# EAGLE board circuit_R1a (EAGLE 7.6.0)
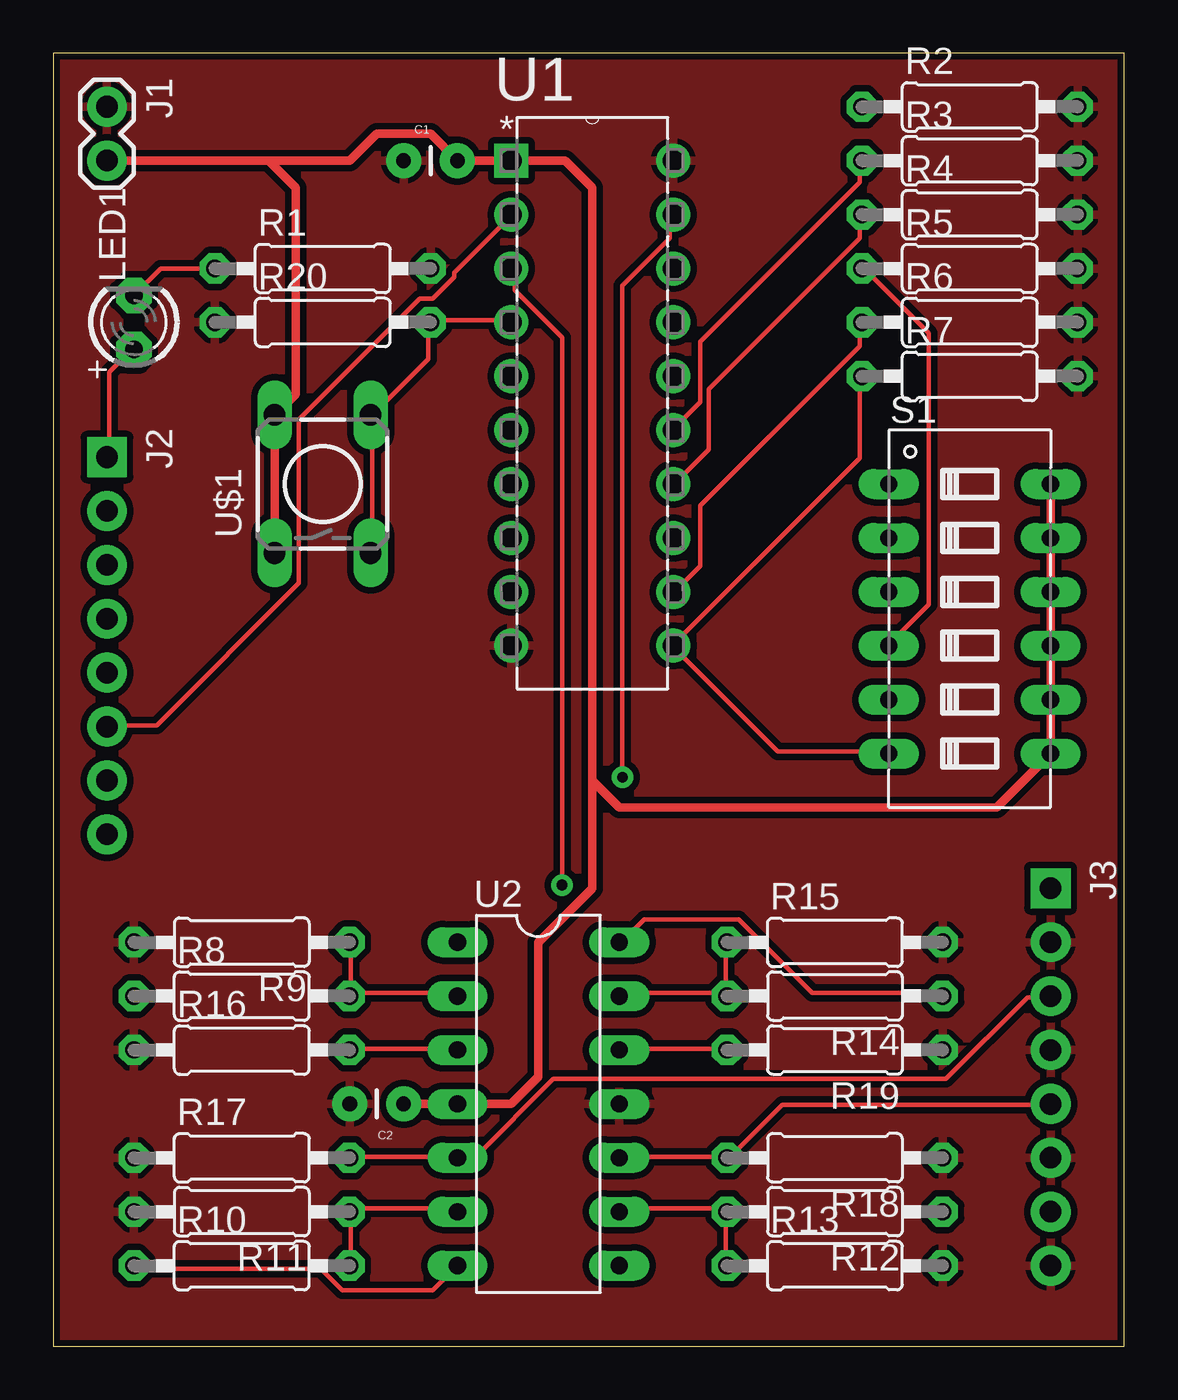
[diagram p0: board, top side]
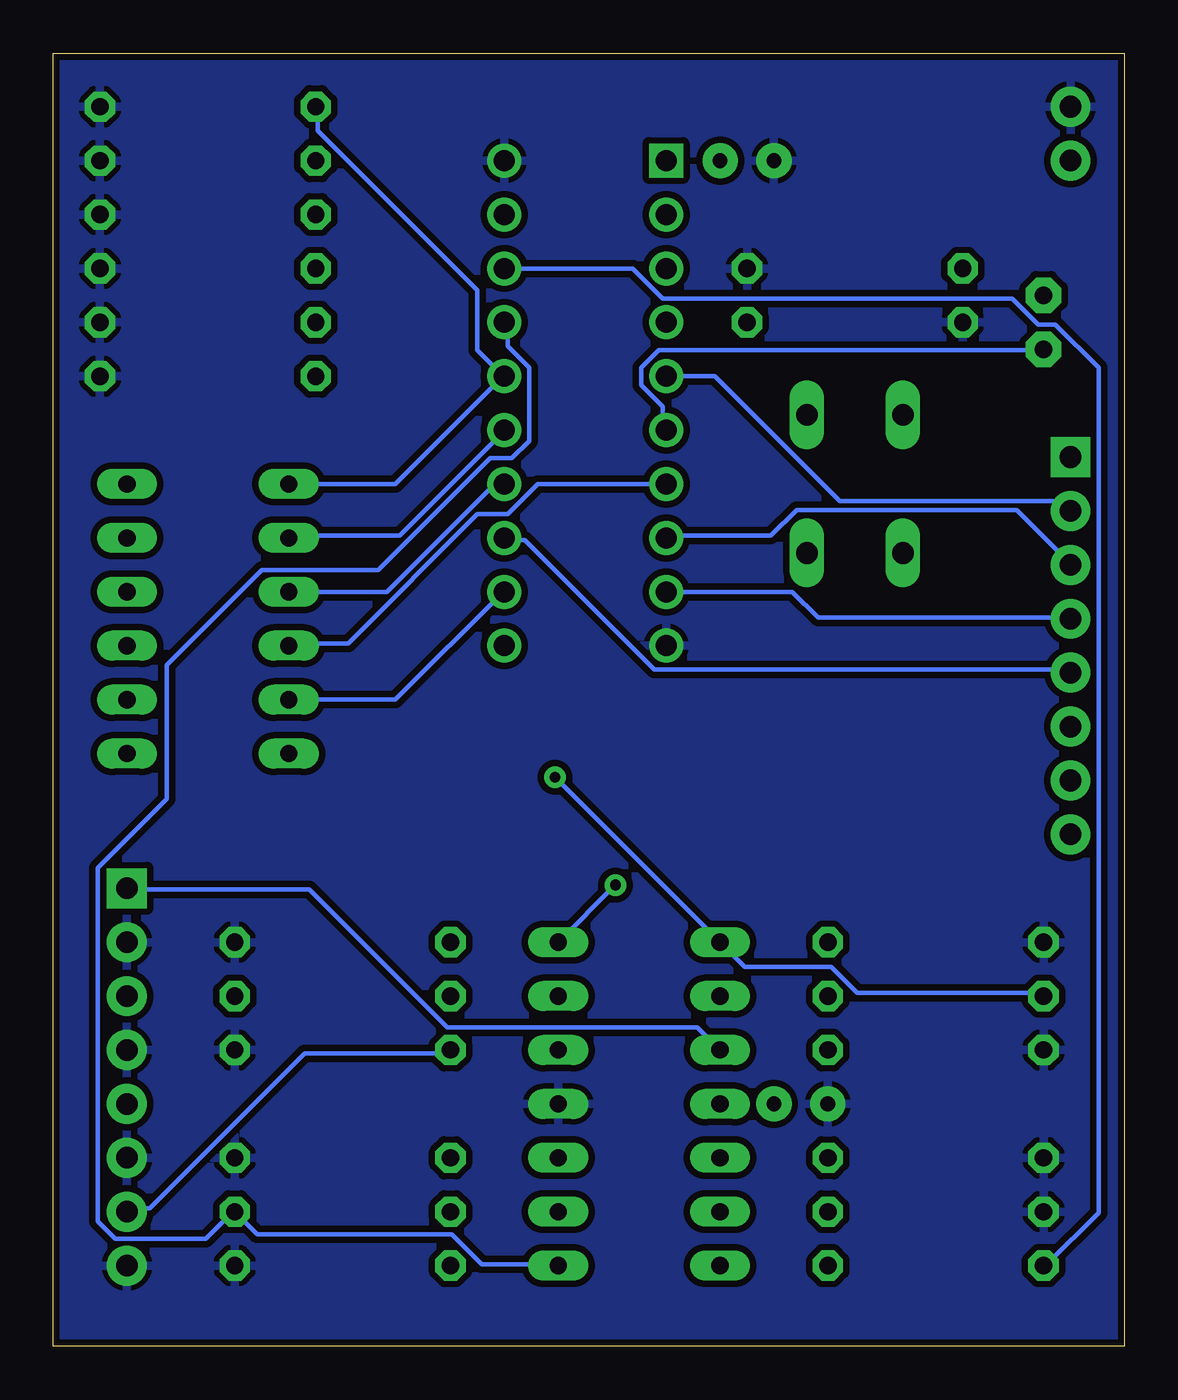
[diagram p1: board, bottom side, seen from below]

Size 50.47 x 60.95 mm. Coordinates in mm from the lower left corner, seen from the top.
Outline: 0,0 50.47,0 50.47,60.95 0,60.95 0,0
Copper layers (1*16): Top 0.035mm / dielectric 1.5mm / Bottom 0.035mm
Design rules "SparkFun": minimum track width 8mil, minimum drill 20mil, track to track 8mil, track to pad 8mil, pad to pad 8mil, via to via 8mil, smd to smd 8mil, copper to edge 8mil, drill to drill 8mil, minimum pad ring 12mil, minimum via ring 10mil, stop-mask expansion 4mil, vias tented up to drill 20mil, thermal gap 10mil

## Footprints (pad centres in the part's own frame; a part is rotated, then mirrored left to right if it is on the bottom)
CAP-PTH-SMALL = drill 0.7 pad 1.651: 1 0,0; 2 2.54,0
1X02 = drill 1.016 pad 1.88: 1 0,0; 2 2.54,0
1X08_PIN1_NO_SILK = drill 1.016 pad 1.88 square: 1 0,0 | drill 1.016 pad 1.88: 2 2.54,0; 3 5.08,0; 4 7.62,0; 5 10.16,0; 6 12.7,0; 7 15.24,0; 8 17.78,0
LED3MM = drill 0.813 pad 1.676 octagon: A -1.27,0; K 1.27,0
0207/10 = drill 0.813 octagon: 1 -5.08,0; 2 5.08,0
DIP06YL = drill 0.813 long: 1 -6.35,-3.81; 2 -3.81,-3.81; 3 -1.27,-3.81; 4 1.27,-3.81; 5 3.81,-3.81; 6 6.35,-3.81; 7 6.35,3.81; 8 3.81,3.81; 9 1.27,3.81; 10 -1.27,3.81; 11 -3.81,3.81; 12 -6.35,3.81
DIP254P762X533-20 = drill 0.991 square: 1 -7.62,22.86 | drill 0.991: 2 -7.62,20.32; 3 -7.62,17.78; 4 -7.62,15.24; 5 -7.62,12.7; 6 -7.62,10.16; 7 -7.62,7.62; 8 -7.62,5.08; 9 -7.62,2.54; 10 -7.62,0; 11 0,0; 12 0,2.54; 13 0,5.08; 14 0,7.62; 15 0,10.16; 16 0,12.7; 17 0,15.24; 18 0,17.78; 19 0,20.32; 20 0,22.86
DIL14 = drill 0.813 long: 1 -7.62,-3.81; 2 -5.08,-3.81; 3 -2.54,-3.81; 4 0,-3.81; 5 2.54,-3.81; 6 5.08,-3.81; 7 7.62,-3.81; 8 7.62,3.81; 9 5.08,3.81; 10 2.54,3.81; 11 0,3.81; 12 -2.54,3.81; 13 -5.08,3.81; 14 -7.62,3.81
TAC-SWITCH-PTH = drill 1.016 pad 1.524 long: 1 -3.251,2.261; 2 3.251,2.261; 3 -3.251,-2.261; 4 3.251,-2.261

## Placement (x,y rotation side)
C1  0.1uF  [CAP-PTH-SMALL]  16.51,55.88 0 top
C2  0.1uF  [CAP-PTH-SMALL]  16.51,11.43 180 top
J1  [1X02]  2.54,58.42 270 top
J2  [1X08_PIN1_NO_SILK]  2.54,41.91 270 top
J3  [1X08_PIN1_NO_SILK]  46.99,21.59 270 top
LED1  [LED3MM]  3.81,48.26 90 top
R1  430  [0207/10]  12.7,50.8 0 top
R2  1000  [0207/10]  43.18,58.42 0 top
R3  1000  [0207/10]  43.18,55.88 0 top
R4  1000  [0207/10]  43.18,53.34 0 top
R5  1000  [0207/10]  43.18,50.8 0 top
R6  1000  [0207/10]  43.18,48.26 0 top
R7  1000  [0207/10]  43.18,45.72 0 top
R8  1000  [0207/10]  8.89,16.51 0 top
R9  100  [0207/10]  8.89,19.05 180 top
R10  1000  [0207/10]  8.89,3.81 0 top
R11  100  [0207/10]  8.89,6.35 180 top
R12  1000  [0207/10]  36.83,6.35 180 top
R13  100  [0207/10]  36.83,3.81 0 top
R14  1000  [0207/10]  36.83,16.51 180 top
R15  100  [0207/10]  36.83,19.05 0 top
R16  1000000  [0207/10]  8.89,13.97 0 top
R17  1000000  [0207/10]  8.89,8.89 0 top
R18  1000000  [0207/10]  36.83,8.89 180 top
R19  1000000  [0207/10]  36.83,13.97 180 top
R20  1000  [0207/10]  12.7,48.26 0 top
S1  [DIP06YL]  43.18,34.29 270 top
U1  PIC16F687-I/P  [DIP254P762X533-20]  29.21,33.02 0 top
U2  LM324N  [DIL14]  22.86,11.43 270 top
U$1  TACTILE-SWITCH-PTH  [TAC-SWITCH-PTH]  12.7,40.64 90 top

## Library data of the parts
C1 C2 = SparkFun-Capacitors
J1-J3 = SparkFun-Connectors
LED1 = adafruit
R1-R20 = eagle-ltspice; SPICEMODEL: NONE; SPICEPREFIX: R
S1 = switch-dil; OC_FARNELL: unknown; OC_NEWARK: unknown
U1 = Microchip_By_element14_Batch_1; MPN: PIC16F687-I/P; OC_FARNELL: 1103401; OC_NEWARK: 56J7529; PACKAGE: DIP-20; SUPPLIER: Microchip
U2 = linear
U$1 = GeekAmmo

## Nets
BOUCLIER1: J3.1 R16.2 U2.3
BOUCLIER2: J3.3 R17.2 U2.5
BOUCLIER3: J3.5 R18.2 U2.10
BOUCLIER4: J3.7 R19.2 U2.12
GND: C1.1 C2.2 J1.1 J3.2 J3.4 J3.6 J3.8 R1.2 R2.2 R3.2 R4.2 R5.2 R6.2 R7.2 R9.2 R11.2 R13.2 R15.2 R16.1 R17.1 R18.1 R19.1 R20.1 U1.10 U1.20 U2.11
N$1: R10.2 R11.1 U2.6
N$2: LED1.K R1.1
N$3: R8.2 R9.1 U2.2
N$5: R12.2 R13.1 U2.9
N$6: R14.2 R15.1 U2.13
RA0: R8.1 U1.19 U2.1
RA1: R10.1 U1.18 U2.7
RA2: R12.1 U1.17 U2.8
RA3: R20.2 U1.4 U$1.3 U$1.4
RA4: R14.1 U1.3 U2.14
RA5: J2.6 U1.2
RB4: J2.5 U1.13
RB5: R6.1 S1.5 U1.12
RB6: R7.1 S1.6 U1.11
RC0: R2.1 S1.1 U1.16
RC1: R3.1 S1.2 U1.15
RC2: R4.1 S1.3 U1.14
RC3: R5.1 S1.4 U1.7
RC4: J2.1 LED1.A U1.6
RC5: J2.2 U1.5
RC6: J2.3 U1.8
RC7: J2.4 U1.9
VCC: C1.2 C2.1 J1.2 S1.7 S1.8 S1.9 S1.10 S1.11 S1.12 U1.1 U2.4 U$1.1 U$1.2

## Tracks (layer width: path | path; a pad name or v marks a point on that pad's centre or on a via)
BOUCLIER1
  Top 0.203: R16.2 14.02,14.02 18.9,14.02 U2.3
  Bottom 0.203: U2.3 20.12,15.04 31.9,15.04 38.41,21.54 46.94,21.54 J3.1
BOUCLIER2
  Top 0.203: R17.2 14.02,8.94 18.9,8.94 U2.5 19.1,8.94 19.91,8.94 23.57,12.6 42.06,12.6 45.92,16.46 46.94,16.46 J3.3
BOUCLIER3
  Top 0.203: U2.10 26.82,8.94 31.7,8.94 R18.2 31.9,8.94 34.34,11.38 46.94,11.38 J3.5
BOUCLIER4
  Top 0.203: U2.12 26.82,14.02 31.7,14.02 R19.2
  Bottom 0.203: J3.7 46.94,6.5 45.92,6.5 38.61,13.82 31.9,13.82 R19.2
GND
  pour Top (isolate 0.305): 0,0 0,60.96 50.8,60.96 50.8,0
  pour Bottom (isolate 0.305): 0,0 0,60.96 50.8,60.96 50.8,0
N$1
  Top 0.203: R10.2 14.02,3.86 14.02,6.3 R11.1 14.02,6.5 18.9,6.5 U2.6
N$2
  Top 0.203: R1.1 5.08,50.8 LED1.K
N$3
  Top 0.203: 14.02,16.66 14.02,18.9 R9.1 | 14.02,16.66 18.9,16.66 U2.2 | 14.02,16.66 R8.2
N$5
  Top 0.203: R13.1 31.7,3.86 31.7,6.3 R12.2 31.7,6.5 26.82,6.5 U2.9
N$6
  Top 0.203: 31.7,16.66 26.82,16.66 U2.13 | 31.7,16.66 31.7,18.9 R15.1 | 31.7,16.66 R14.2
RA0  (via drill 0.51)
  Top 0.203: v26.82,26.82 26.82,49.99 29.06,52.22 29.06,53.24 U1.19
  Bottom 0.203: R8.1 3.86,16.66 12.6,16.66 13.82,17.88 17.88,17.88 U2.1 v26.82,26.82
RA1
  Top 0.203: U2.7 17.88,2.64 13.61,2.64 12.6,3.66 3.86,3.66 R10.1
  Bottom 0.203: U1.18 23.16,50.8 21.74,49.38 5.28,49.38 4.06,48.16 3.25,48.16 1.22,46.13 1.22,6.3 3.66,3.86 R10.1
RA2
  Bottom 0.203: U2.8 26.82,3.86 30.28,3.86 31.7,5.28 40.84,5.28 R12.1 42.06,6.3 43.28,5.08 47.55,5.08 48.36,5.89 48.36,22.55 45.11,25.81 45.11,32.11 40.64,36.58 35.15,36.58 29.87,41.86 28.85,41.86 28.04,42.67 28.04,46.13 29.06,47.14 29.06,48.16 U1.17
RA3
  Top 0.203: U1.4 21.54,48.36 17.88,48.36 R20.2 17.68,48.16 17.68,46.53 15.04,43.89 | 15.04,43.89 15.04,37.39 U$1.3 | 15.04,43.89 U$1.4
RA4  (via drill 0.51)
  Top 0.203: R14.1 41.86,16.66 35.76,16.66 32.31,20.12 27.84,20.12 26.82,19.1 U2.14 | v23.98,21.74 23.98,47.55 21.74,49.78 21.74,50.8 U1.3
  Bottom 0.203: U2.14 v23.98,21.74
RA5
  Top 0.203: U1.2 21.54,53.24 18.9,50.6 18.9,50.39 17.88,49.38 17.27,49.38 11.58,43.69 11.58,35.97 4.88,29.26 2.64,29.26 J2.6
RB4
  Bottom 0.203: U1.13 29.06,38 28.25,38 22.15,31.9 2.64,31.9 J2.5
RB5
  Top 0.203: R6.1 38,48.16 38,47.14 30.48,39.62 30.48,36.78 29.26,35.56 U1.12
  Bottom 0.203: S1.5 34.34,30.48 29.26,35.56 U1.12
RB6
  Top 0.203: S1.6 39.22,28.04 34.14,28.04 29.26,32.92 U1.11 29.26,33.12 38,41.86 38,45.72 R7.1
RC0
  Bottom 0.203: S1.1 34.34,40.64 29.26,45.72 | 29.26,45.72 30.48,46.94 30.48,49.78 38,57.3 38,58.32 R2.1 | 29.26,45.72 U1.16
RC1
  Top 0.203: R3.1 38,55.88 38,54.86 30.48,47.35 30.48,44.5 29.26,43.28 U1.15
  Bottom 0.203: S1.2 39.22,38.2 34.14,38.2 29.26,43.08 U1.15
RC2
  Top 0.203: R4.1 38,53.24 38,52.22 30.89,45.11 30.89,42.27 29.26,40.64 U1.14
  Bottom 0.203: S1.3 34.75,35.56 29.67,40.64 U1.14
RC3
  Top 0.203: S1.4 39.42,33.12 41.25,34.95 41.25,47.75 38.2,50.8 R5.1
  Bottom 0.203: U1.7 27.64,40.64 29.06,39.22 30.48,39.22 36.58,33.12 39.22,33.12 S1.4
RC4
  Top 0.203: J2.1 2.64,42.06 2.64,45.92 3.66,46.94 LED1.A
  Bottom 0.203: U1.6 21.74,43.28 21.74,44.3 22.76,45.31 22.76,46.13 21.95,46.94 3.86,46.94 LED1.A
RC5
  Bottom 0.203: U1.5 19.3,45.72 13.41,39.83 3.05,39.83 2.64,39.42 J2.2
RC6
  Bottom 0.203: U1.8 21.54,38.2 16.66,38.2 15.44,39.42 5.08,39.42 2.64,36.98 J2.3
RC7
  Bottom 0.203: U1.9 15.65,35.56 14.43,34.34 2.64,34.34 J2.4
VCC
  Top 0.406: J1.2 10.16,55.88 | 10.16,55.88 13.97,55.88 15.24,57.15 17.78,57.15 C1.2 U1.1 24.13,55.88 25.4,54.61 25.4,26.67 | 25.4,26.67 25.4,21.59 22.86,19.05 22.86,12.7 21.59,11.43 U2.4 C2.1 | 25.4,26.67 26.67,25.4 44.45,25.4 S1.7 S1.8 S1.9 S1.10 S1.11 S1.12 | 10.16,55.88 11.43,54.61 11.43,44.88 U$1.2 U$1.1